# Altium PCB 01.PcbDoc (part 2 of 2)
Units mil, origin at the board's own origin, x right, y up, seen from the top; angles counter-clockwise.
Board outline 1732.26 x 1717.09 mil, 4 copper layers (Top Layer, Layer 1, Layer 2, Bottom Layer), stack 61.855 mil thick; 174 components, 95 nets, 460 pads, 94 vias.
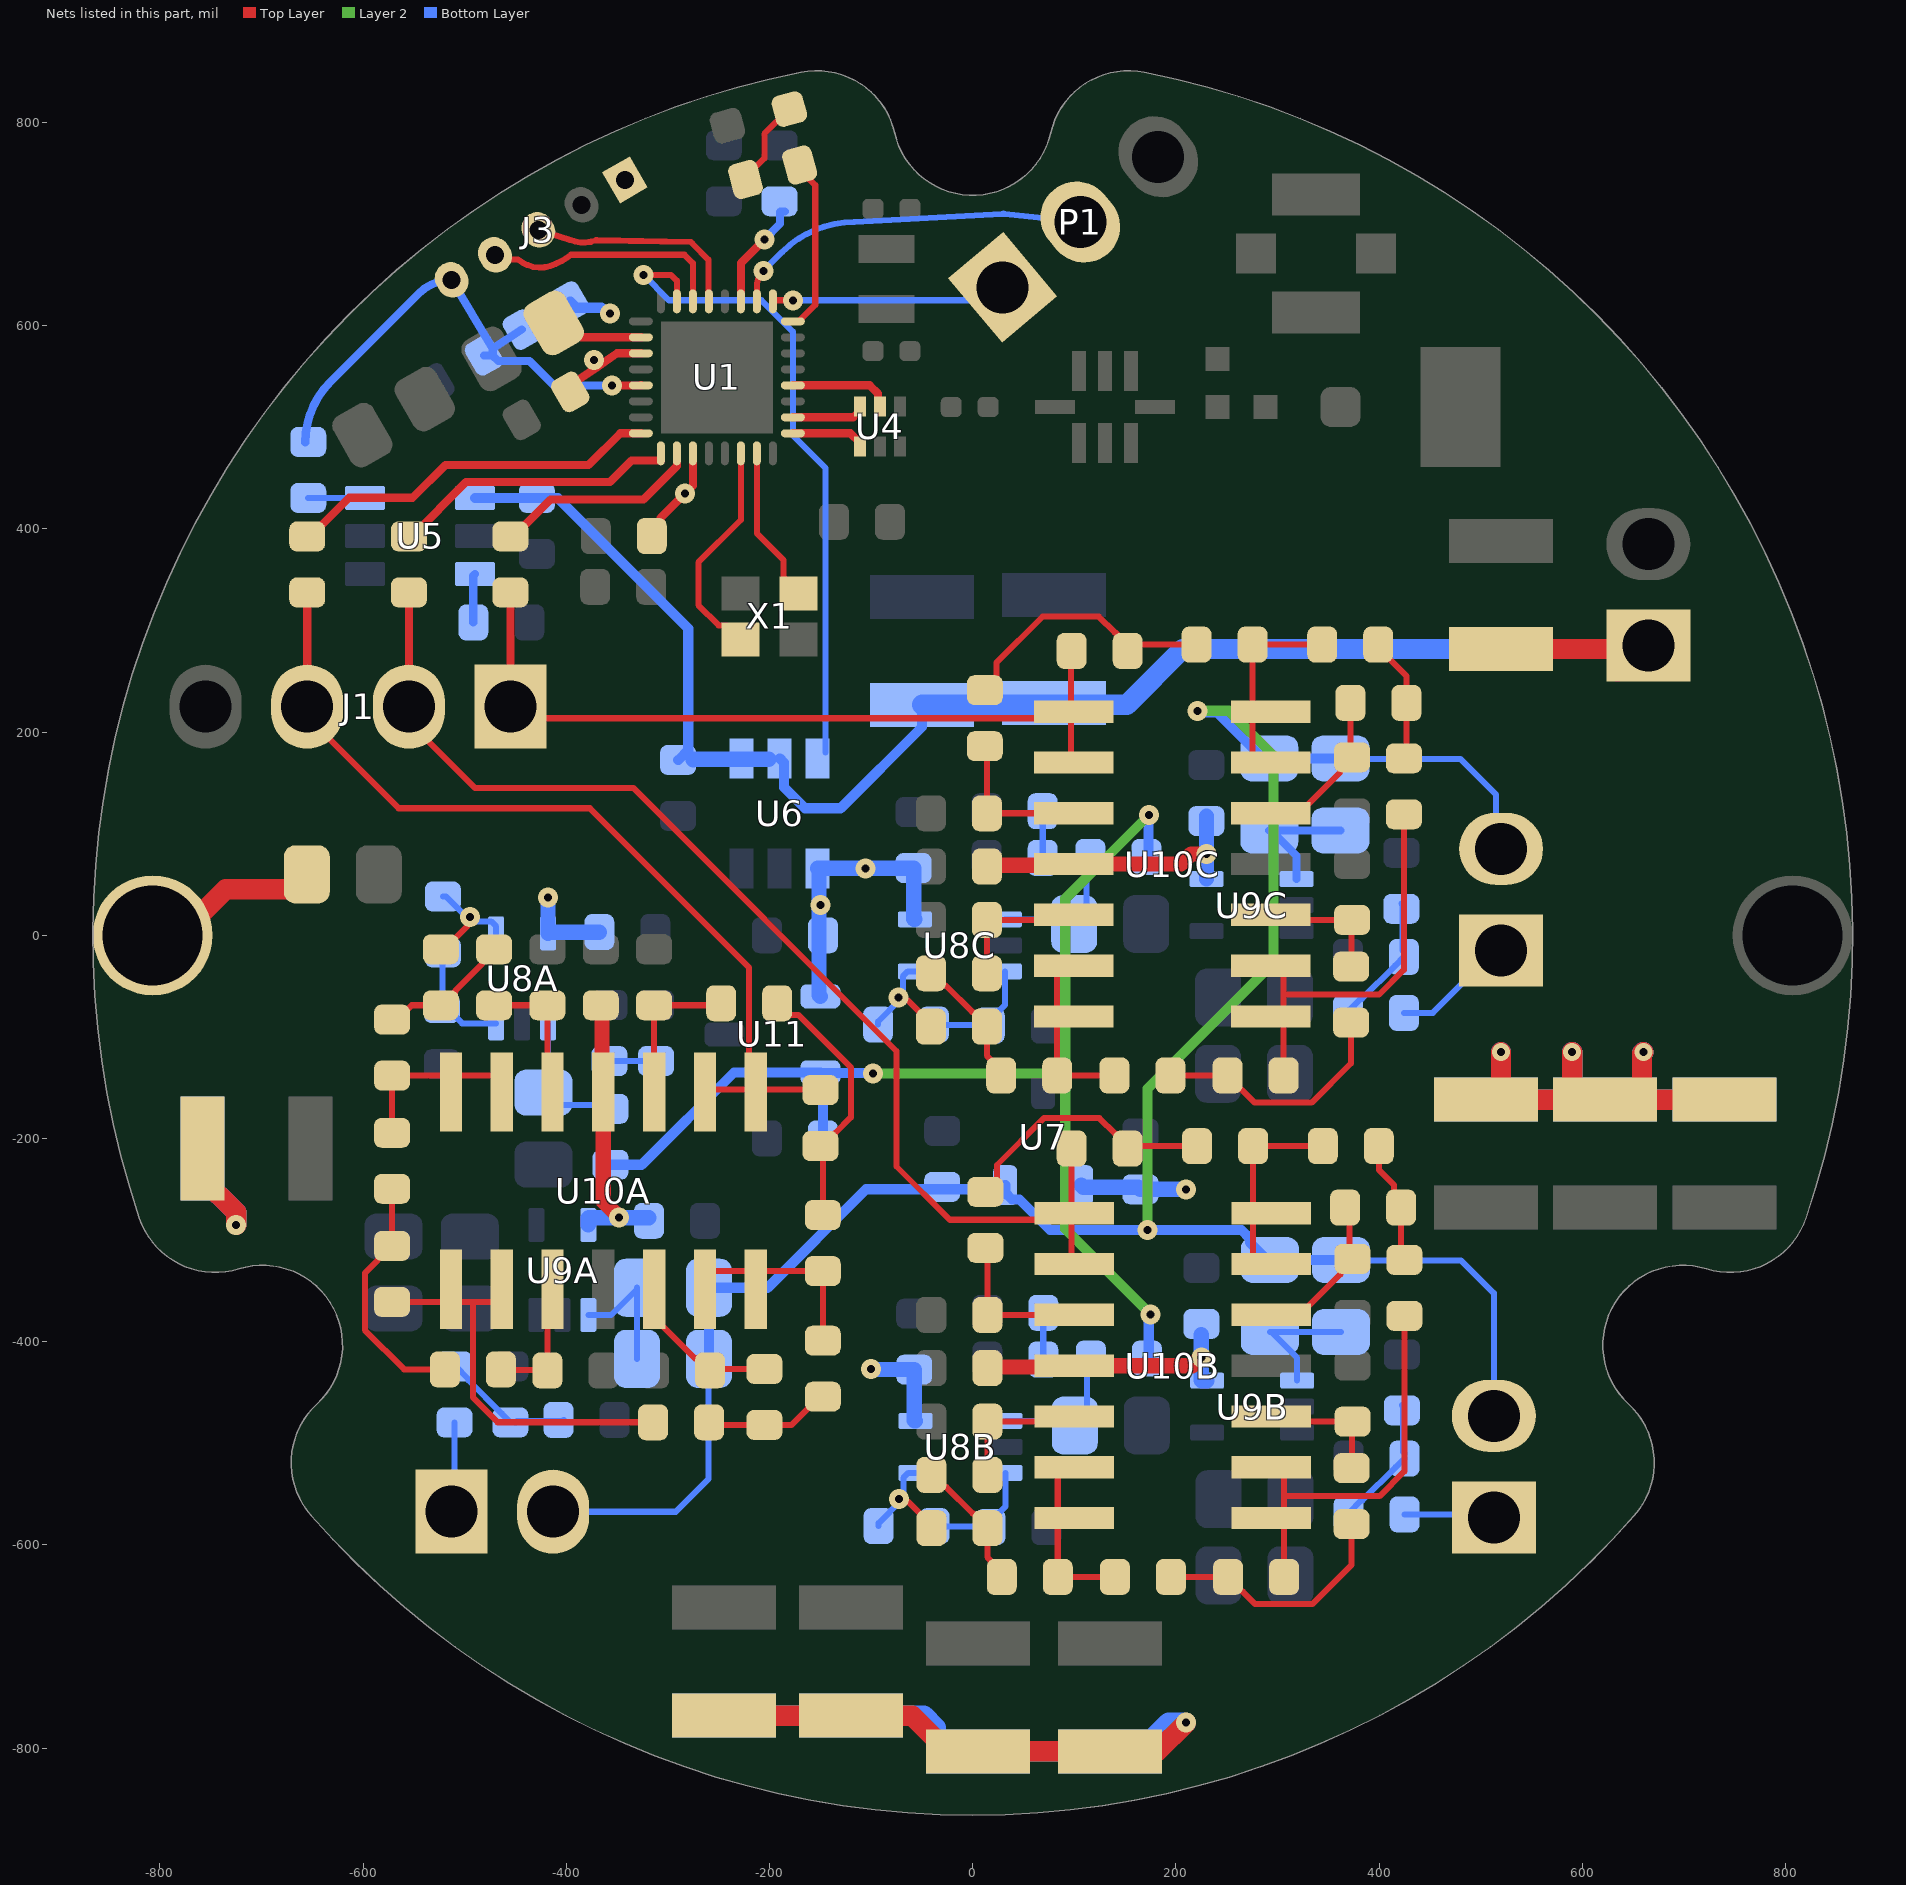
[diagram p4: the nets of this part, all layers, seen from the top]

## Via types
v1: diameter 17.72/19.68/19.68/19.68 (per signal layer), hole 7.87, Top Layer to Bottom Layer, tented both sides, 80 vias
v2: diameter 17.72, hole 7.87, Top Layer to Bottom Layer, tented both sides, 14 vias

## Nets (pads, with @x,y where several pads share a name; then routed paths per layer and width w, separated by ;. In a path a pad name is that pad's centre, name@x,y a point inside that pad or via, vN(x,y) a via of type N, cw(c..) or ccw(c..) an arc to the next point about the centre after c; other vN are vias at no path point) (continued)
NetC28A_1: C28A.1 R11A.2 R12A.1 | length 126.9
  Bottom Layer w6: R11A.2@-510,-424.33 -508.88,-424.33 -496.28,-436.92 -496.28,-438.05 -463.56,-470.77 -463.46,-470.77 R12A.1@-455,-479.23 ; R12A.1@-450,-479.45 -448.72,-478.17 -403.84,-478.17 C28A.1@-402.56,-476.89
NetC28B_1: C28B.1 R11B.2 R12B.1 | length 126.9
  Bottom Layer w6: R11B.2@369.88,-570 369.88,-568.88 382.48,-556.28 383.6,-556.28 416.32,-523.56 416.32,-523.46 R12B.1@424.78,-515 ; C28B.1@422.44,-462.56 423.72,-463.84 423.72,-508.72 R12B.1@425,-510
NetC28C_1: C28C.1 R11C.2 R12C.1 | length 126.9
  Bottom Layer w6: R11C.2@369.33,-76.34 369.33,-75.22 381.92,-62.62 383.05,-62.62 415.77,-29.9 415.77,-29.8 R12C.1@424.23,-21.34 ; C28C.1@421.89,31.1 423.17,29.82 423.17,-15.06 R12C.1@424.45,-16.34
NetC29A_1: C29A.1 C34A.2 R14A.2 R15A.1 U8A.1 | length 223.5
  Bottom Layer w6: U8A.1@-417.97,-86.62 -417.97,-150.31 -420.26,-152.6 -405.87,-167 -360.33,-167 -357.06,-163.73 -357.06,-124.39 R15A.1@-357.56,-123.89 C34A.2@-311.56,-123.89
NetC29B_1: C29B.1 C34B.2 R14B.2 R15B.1 U8B.1 | length 223.5
  Bottom Layer w6: U8B.1@32.17,-477.97 95.86,-477.97 98.15,-480.26 112.55,-465.87 112.55,-420.33 109.28,-417.06 69.94,-417.06 R15B.1@69.44,-417.56 C34B.2@69.44,-371.56
NetC29C_1: C29C.1 C34C.2 R14C.2 R15C.1 U8C.1 | length 223.5
  Bottom Layer w6: U8C.1@31.62,15.69 95.31,15.69 97.6,13.4 112,27.79 112,73.33 108.73,76.6 69.39,76.6 R15C.1@68.89,76.1 C34C.2@68.89,122.1
NetC30A_1: C30A.1 R13A.2 U9A.1 | length 128.5
  Bottom Layer w6: U9A.1@-378.36,-373.73 -355.88,-373.73 C30A.1@-330.43,-348.29 ; R13A.2@-330.43,-416.89 C30A.1@-330.43,-348.29 ; C30A.1@-330.43,-346.89 C30A.1@-330.43,-348.29
NetC30B_1: C30B.1 R13B.2 U9B.1 | length 128.5
  Bottom Layer w6: C30B.1@292.44,-390.43 C30B.1@293.84,-390.43 ; U9B.1@319.28,-438.36 319.28,-415.88 C30B.1@293.84,-390.43 ; R13B.2@362.44,-390.43 C30B.1@293.84,-390.43
NetC30C_1: C30C.1 R13C.2 U9C.1 | length 128.2
  Bottom Layer w8: C30C.1@291.89,103.23 C30C.1@293.83,103.23 ; U9C.1@318.73,55.3 318.73,78.33 C30C.1@293.83,103.23 ; R13C.2@361.89,103.23 C30C.1@293.83,103.23
NetC35A_1: C35A.1 R16A.2 R17A.1 | length 259.2
  Top Layer w6: R17A.1@-196,-66.91 -184.57,-78.34 -171.66,-78.34 -120,-130 -120,-179.14 -135.55,-194.69 -135.55,-195.27 -146.98,-206.7 -147.56,-206.7 R16A.2@-147.56,-275.3
NetC35A_2: C35A.2 J1.3 R2.1 U10A.1 U10A.2 | length 899.2
  Top Layer w6: J1.3@-655,225 -655,215 -565,125 -376.89,125 -220,-31.89 -220,-147.89 U10A.1@-216.31,-151.58 ; U10A.2@-263.56,-154.33 -260.81,-151.58 U10A.1@-216.31,-151.58 ; U10A.1@-213.56,-154.33 U10A.1@-216.31,-151.58 ; U10A.1@-213.56,-151.58 C35A.2@-147.56,-151.58
  Top Layer w8: J1.3@-655,225 R2.1@-655,337.44
NetC35B_1: C35B.1 R16B.2 R17B.1 | length 262.4
  Top Layer w6: R17B.1@12.46,-256 23.89,-244.57 23.89,-226.11 70,-180 124.69,-180 140.24,-195.55 140.82,-195.55 152.25,-206.98 152.25,-207.56 R16B.2@220.85,-207.56
NetC35B_2: C35B.2 J1.2 R3.1 U10B.1 U10B.2 | length 1165
  Top Layer w6: J1.2@-555,225 -555,210 -490,145 -334,145 -75,-114 -75,-227.56 -22.56,-280 93.44,-280 97.13,-276.31 97.13,-320.81 U10B.2@99.88,-323.56 ; U10B.1@97.13,-273.56 C35B.2@97.13,-207.56
  Top Layer w8: J1.2@-555,225 R3.1@-555,337.44
NetC35C_1: C35C.1 R16C.2 R17C.1 | length 262.9
  Top Layer w6: R17C.1@11.91,237.66 23.34,249.09 23.34,268.34 68.66,313.66 124.14,313.66 139.69,298.11 140.27,298.11 151.7,286.68 151.7,286.1 R16C.2@220.3,286.1
NetC35C_2: C35C.2 J1.1 R4.1 U10C.1 U10C.2 | length 791.3
  Top Layer w6: J1.1@-455,225 -443.66,213.66 92.89,213.66 U10C.1@96.58,217.35 ; C35C.2@96.58,286.1 U10C.1@96.58,217.35 ; U10C.2@99.33,170.1 96.58,172.85 U10C.1@96.58,217.35 ; U10C.1@99.33,220.1 U10C.1@96.58,217.35
  Top Layer w8: J1.1@-455,225 R4.1@-455,337.44
NetC36A_1: C36A.1 R18A.2 R19A.1 | length 124.4
  Top Layer w6: R18A.2@-259.44,-479.33 -256.88,-481.89 R19A.1@-205,-481.89 -178.26,-481.89 -150.51,-454.14 C36A.1@-147.56,-454.14
NetC36A_2: C36A.2 R16A.1 U10A.13 U10A.14 | length 197.8
  Top Layer w6: U10A.13@-263.56,-348.33 -263.56,-338.42 -255.56,-330.42 R16A.1@-147.56,-330.42 C36A.2@-147.56,-399.02
NetC36B_1: C36B.1 R18B.2 R19B.1 | length 122.5
  Top Layer w6: C36B.1@399.69,-207.56 399.76,-207.63 399.76,-230.76 414.84,-245.84 414.84,-253.62 426.22,-265 R19B.1@427.44,-265 ; R19B.1@421.56,-268 421.56,-316.12 R18B.2@424.88,-319.44
NetC36B_2: C36B.2 R16B.1 U10B.13 U10B.14 | length 197.8
  Top Layer w6: U10B.13@293.88,-323.56 283.97,-323.56 275.97,-315.56 R16B.1@275.97,-207.56 C36B.2@344.57,-207.56
NetC36C_1: C36C.1 R18C.2 R19C.1 | length 124.4
  Top Layer w6: C36C.1@399.14,286.1 399.14,283.15 426.89,255.4 R19C.1@426.89,228.66 426.89,176.78 R18C.2@424.33,174.22
NetC36C_2: C36C.2 R16C.1 U10C.13 U10C.14 | length 197.8
  Top Layer w6: U10C.13@293.33,170.1 283.42,170.1 275.42,178.1 R16C.1@275.42,286.1 C36C.2@344.02,286.1
NetC37A_1: C37A.1 R20A.2 R21A.1 | length 245.3
  Top Layer w6: R20A.2@-571.56,-249.52 C37A.1@-571.56,-305.77 -572.14,-305.77 -586,-319.63 -586,-320.21 -598.28,-332.49 -598.28,-388.61 -559.56,-427.33 R21A.1@-519.56,-427.33
NetC37A_2: C37A.2 R18A.1 U10A.8 U10A.9 | length 398.3
  Top Layer w6: C37A.2@-571.56,-360.89 -513.56,-360.89 -490,-360.89 ; U10A.9@-463.56,-348.33 -463.56,-352.89 -471.56,-360.89 -490,-360.89 ; R18A.1@-314.56,-479.33 -467.56,-479.33 -492,-454.89 -492,-362.89 -490,-360.89
NetC37B_1: C37B.1 R20B.2 R21B.1 | length 245.3
  Top Layer w6: R20B.2@195.07,-631.56 C37B.1@251.32,-631.56 251.32,-632.14 265.18,-646 265.76,-646 278.04,-658.28 334.17,-658.28 372.88,-619.56 R21B.1@372.88,-579.56
NetC37B_2: C37B.2 R18B.1 U10B.8 U10B.9 | length 398.3
  Top Layer w6: U10B.9@293.88,-523.56 298.44,-523.56 306.44,-531.56 306.44,-550 ; C37B.2@306.44,-631.56 306.44,-573.56 306.44,-550 ; R18B.1@424.88,-374.56 424.88,-527.56 400.44,-552 308.44,-552 306.44,-550
NetC37C_1: C37C.1 R20C.2 R21C.1 | length 245.3
  Top Layer w6: R20C.2@194.52,-137.9 C37C.1@250.77,-137.9 250.77,-138.48 264.63,-152.34 265.21,-152.34 277.49,-164.61 333.61,-164.61 372.33,-125.9 R21C.1@372.33,-85.9
NetC37C_2: C37C.2 R18C.1 U10C.8 U10C.9 | length 398.3
  Top Layer w6: U10C.9@293.33,-29.9 297.89,-29.9 305.89,-37.9 305.89,-56.34 ; C37C.2@305.89,-137.9 305.89,-79.9 305.89,-56.34 ; R18C.1@424.33,119.1 424.33,-33.9 399.89,-58.34 307.89,-58.34 305.89,-56.34
NetC38A_1: C38A.1 R22A.2 R23A.1 | length 131.4
  Top Layer w6: C38A.1@-571.56,-83.02 -566.23,-83.02 -552.1,-68.89 -522.98,-68.89 -509.12,-55.03 -509.12,-54.45 -483.07,-28.4 -483.07,-25.2 -471.64,-13.77 R23A.1@-471.06,-13.77
NetC38A_2: C38A.2 R20A.1 U10A.6 U10A.7 | length 175.8
  Top Layer w6: R20A.1@-571.56,-194.4 C38A.2@-571.56,-138.14 -471.56,-138.14 -463.56,-146.14 U10A.6@-463.56,-154.33
NetC38B_1: C38B.1 R22B.2 R23B.1 | length 131.4
  Top Layer w6: R23B.1@-40.68,-531.06 -40.68,-531.64 -29.25,-543.07 -26.05,-543.07 0,-569.12 0.58,-569.12 14.44,-582.98 14.44,-612.1 28.58,-626.23 C38B.1@28.58,-631.56
NetC38B_2: C38B.2 R20B.1 U10B.6 U10B.7 | length 175.8
  Top Layer w6: U10B.6@99.88,-523.56 91.69,-523.56 83.69,-531.56 C38B.2@83.69,-631.56 R20B.1@139.95,-631.56
NetC38C_1: C38C.1 R22C.2 R23C.1 | length 131.4
  Top Layer w6: R23C.1@-41.23,-37.4 -41.23,-37.98 -29.8,-49.41 -26.6,-49.41 -0.55,-75.46 0.03,-75.46 13.89,-89.32 13.89,-118.44 28.02,-132.57 C38C.1@28.02,-137.9
NetC38C_2: C38C.2 R20C.1 U10C.6 U10C.7 | length 175.8
  Top Layer w6: U10C.6@99.33,-29.9 91.14,-29.9 83.14,-37.9 C38C.2@83.14,-137.9 R20C.1@139.4,-137.9
NetC39A_2: C39A.2 R17A.2 U10A.3 | length 148.9
  Top Layer w6: U10A.3@-313.56,-154.33 C39A.2@-313.56,-68.89 -253.68,-68.89 R17A.2@-251.12,-66.33
NetC39B_2: C39B.2 R17B.2 U10B.3 | length 148.9
  Top Layer w6: R17B.2@11.88,-311.12 14.44,-313.68 C39B.2@14.44,-373.56 U10B.3@99.88,-373.56
NetC39C_2: C39C.2 R17C.2 U10C.3 | length 148.9
  Top Layer w6: R17C.2@11.33,182.54 13.89,179.98 C39C.2@13.89,120.1 U10C.3@99.33,120.1
NetC40A_1: C40A.1 R19A.2 U10A.12 | length 159.1
  Top Layer w6: U10A.12@-313.56,-348.33 -313.56,-376.33 -273.57,-416.32 -269.87,-416.32 -258.44,-427.75 C40A.1@-258.44,-428.33 -256.88,-426.77 R19A.2@-205,-426.77
NetC40B_1: C40B.1 R19B.2 U10B.12 | length 158.5
  Top Layer w6: U10B.12@293.88,-373.56 321.88,-373.56 361.87,-333.57 361.87,-329.87 373.3,-318.44 C40B.1@373.88,-318.44 371,-315.56 371,-272.56 R19B.2@366.44,-268
NetC40C_1: C40C.1 R19C.2 U10C.12 | length 159.1
  Top Layer w6: U10C.12@293.33,120.1 321.33,120.1 361.32,160.09 361.32,163.79 372.75,175.22 C40C.1@373.33,175.22 371.77,176.78 R19C.2@371.77,228.66
NetC41A_2: C41A.2 R21A.2 U10A.10 | length 128.4
  Top Layer w6: R21A.2@-464.44,-427.33 -463.94,-427.83 -419.06,-427.83 C41A.2@-418.56,-428.33 -418.56,-353.33 U10A.10@-413.56,-348.33
NetC41B_2: C41B.2 R21B.2 U10B.10 | length 128.4
  Top Layer w6: U10B.10@293.88,-473.56 298.88,-478.56 C41B.2@373.88,-478.56 373.38,-479.06 373.38,-523.94 R21B.2@372.88,-524.44
NetC41C_2: C41C.2 R21C.2 U10C.10 | length 128.4
  Top Layer w6: U10C.10@293.33,20.1 298.33,15.1 C41C.2@373.33,15.1 372.83,14.6 372.83,-30.28 R21C.2@372.33,-30.78
NetC42A_2: C42A.2 R23A.2 U10A.5 | length 140
  Top Layer w6: R23A.2@-471.06,-68.89 C42A.2@-418.56,-68.89 -418.56,-149.33 U10A.5@-413.56,-154.33
NetC42B_2: C42B.2 R23B.2 U10B.5 | length 140
  Top Layer w6: R23B.2@14.44,-531.06 C42B.2@14.44,-478.56 94.88,-478.56 U10B.5@99.88,-473.56
NetC42C_2: C42C.2 R23C.2 U10C.5 | length 140
  Top Layer w6: R23C.2@13.89,-37.4 C42C.2@13.89,15.1 94.33,15.1 U10C.5@99.33,20.1
NetC55_2: C55.2 MH1.1 | length 177.7
  Top Layer w20: MH1.1@-807.09,0 -780.54,0 -735.06,45.48 -667.99,45.48 -655.43,58.03 C55.2@-655.43,60
NetD1_2: D1.2 R1.2 | length 87.1
  Top Layer w6: R1.2@-223.62,743.87 -223.62,746.14 -205,764.76 -205,788.73 D1.2@-180.58,813.15
NetL1_2: L1.2 U1.18 | length 91.5
  Top Layer w8: L1.2@-412.31,602.72 -399.18,602.72 -385.03,588.57 U1.18@-326.68,588.57
NetP1_1: P1.1 U1.9 | length 229.8
  Top Layer w6: U1.9@-196.76,624 cw(c-194.34,621.59) -194.34,625 v1(-177,625)
  Bottom Layer w6: v1(-177,625) -1.32,625 ccw(c-1.32,668.43) P1.1@29.4,637.72
NetP1_2: P1.2 U1.10 | length 360
  Top Layer w6: U1.10@-212.5,624 -212.5,638.3 cw(c-190.3,638.3) v1(-206,654)
  Bottom Layer w6: v1(-206,654) -187.29,672.71 cw(c-116.58,602) -116.58,702 ccw(c-116.58,708) -116.24,702.01 28.91,710.13 cw(c29.97,692.16) 31.96,710.05 P1.2@106,702
NetP3A_1: P3A.1 R11A.1 | length 89.1
  Bottom Layer w6: P3A.1@-513,-567.33 -510,-564.33 R11A.1@-510,-479.45
NetP3B_1: P3B.1 R11B.1 | length 89.1
  Bottom Layer w6: R11B.1@425,-570 509.88,-570 P3B.1@512.88,-573
NetP3C_1: P3C.1 R11C.1 | length 111.8
  Bottom Layer w6: R11C.1@424.45,-76.34 452.76,-76.34 504.09,-25 P3C.1@515,-25
NetR1_1: R1.1 U1.8 | length 172.7
  Top Layer w6: U1.8@-177.07,604.32 -171.25,604.32 -155,620.56 -155,738.34 -170.38,753.72 R1.1@-170.38,758.13
NetR2_2: R2.2 U1.24 | length 370.4
  Top Layer w8: R2.2@-655,392.56 -652.05,392.56 -613.99,430.62 -551.38,430.62 -519,463 -378,463 -346.92,494.08 U1.24@-326.68,494.08
NetR3_2: R3.2 U1.25 | length 286.1
  Top Layer w8: R3.2@-555,392.56 -552.05,392.56 -498.61,446 -357,446 -335.86,467.14 -307.06,467.14 -306.99,467.21 U1.25@-306.99,474.39
NetR4_2: R4.2 U1.26 | length 205.1
  Top Layer w8: R4.2@-455,392.56 -452.05,392.56 -415.61,429 -324,429 -291.24,461.76 U1.26@-291.24,474.39
NetR6_1: R6.1 U5.6 | length 55.8
  Bottom Layer w6: R6.1@-653.96,430.4 U5.6@-598.13,430.4
NetR7_1: R7.1 U5.3 | length 48.3
  Bottom Layer w8: R7.1@-491.56,308 -491.56,353.91 U5.3@-489.87,355.6
NetR9A_1: R9A.1 R10A.2 U8A.3 | length 113.9
  Bottom Layer w6: R10A.2@-521.56,-16.89 -522.06,-17.39 -522.06,-71.27 -517.73,-71.27 -502.38,-86.62 U8A.3@-469.15,-86.62
NetR9B_1: R9B.1 R10B.2 U8B.3 | length 113.9
  Bottom Layer w6: R10B.2@-37.56,-581.56 -37.06,-582.06 16.82,-582.06 16.82,-577.73 32.17,-562.38 U8B.3@32.17,-529.15
NetR9C_1: R9C.1 R10C.2 U8C.3 | length 113.9
  Bottom Layer w6: R10C.2@-38.11,-87.9 -37.61,-88.4 16.27,-88.4 16.27,-84.07 31.62,-68.72 U8C.3@31.62,-35.49
NetR10A_1: R10A.1 R22A.1 U8A.4 | length 113.2
  Top Layer w6: R22A.1@-523.56,-13.77 -520.61,-13.77 -497.24,9.59 -497.24,15.87 v1(-495,18.11)
  Bottom Layer w6: R10A.1@-521.56,38.23 -518.61,38.23 v1@-496.74,16.37 ; v1@-494.1,13.72 -474.02,13.72 -469.15,8.85 U8A.4@-469.15,1.96
NetR10B_1: R10B.1 R22B.1 U8B.4 | length 113.2
  Top Layer w6: v1(-72.56,-555) -70.32,-557.24 -64.04,-557.24 -40.68,-580.61 R22B.1@-40.68,-583.56
  Bottom Layer w6: R10B.1@-92.68,-581.56 -92.68,-578.61 v1@-70.82,-556.74 ; v1@-68.17,-554.1 -68.17,-534.02 -63.3,-529.15 U8B.4@-56.41,-529.15
NetR10C_1: R10C.1 R22C.1 U8C.4 | length 113.2
  Top Layer w6: v1(-73.11,-61.34) -70.87,-63.58 -64.59,-63.58 -41.23,-86.94 R22C.1@-41.23,-89.9
  Bottom Layer w6: R10C.1@-93.23,-87.9 -93.23,-84.94 v1@-71.37,-63.08 ; v1@-68.72,-60.44 -68.72,-40.36 -63.85,-35.49 U8C.4@-56.96,-35.49
NetU1_1: U1.1 U4.4 | length 73.8
  Top Layer w8: U1.1@-177.07,494.08 -120.14,494.08 -111,484.94 U4.4@-111,481
NetU1_2: U1.2 U4.3 | length 72.7
  Top Layer w8: U1.2@-177.07,509.83 -117.61,509.83 -111,516.43 U4.3@-111,520.37
NetU1_4: U1.4 U4.2 | length 100.8
  Top Layer w8: U1.4@-177.07,541.32 -101.32,541.32 -93.22,533.22 -93.22,522.28 U4.2@-91.32,520.37
NetU1_30: U1.30 X1.3 | length 222.1
  Top Layer w6: X1.3@-228.54,291.36 -242.28,305.09 -250.09,305.09 -270,325 -270,367 -228.25,408.75 U1.30@-228.25,474.39
NetU1_31: U1.31 X1.1 | length 154.3
  Top Layer w6: U1.31@-212.5,474.39 -212.5,395.5 -186.16,369.16 -186.16,352.37 -172.43,338.64 X1.1@-170.46,338.64
RESET: C10.1 J3.5 R5.1 R6.2 U1.21 | length 512
  Top Layer w8: v1(-355,541) -354.74,541.26 -326.74,541.26 U1.21@-326.68,541.32
  Bottom Layer w8: R6.2@-657,485 cw(c-572.5,485) -632.22,544.78 -545.23,631.77 cw(c-512.86,599.41) J3.5@-512.86,645.18 C10.1@-472.47,577.65 ; C10.1@-481.13,570.78 C10.1@-472.47,570.78 ; R5.1@-443.87,596.22 C10.1@-472.47,577.65 ; v1(-355,541) -412,541 -436.34,565.34 -467.04,565.34 C10.1@-472.47,570.78 ; C10.1@-472.47,570.78 C10.1@-472.47,577.65
TCKC: J3.4 U1.14 | length 226.8
  Top Layer w6: J3.4@-456.27,665.33 -447.58,665.33 ccw(c-425.65,690.98) -410.73,660.72 -410.64,660.76 -409.11,661.51 ccw(c-427.6,707.57) -395.35,669.84 -283.85,669.84 -275.5,661.49 U1.14@-275.5,624
TMSC: J3.3 U1.13 | length 218.3
  Top Layer w6: J3.3@-427.62,694.39 J3.3@-423.78,694.39 ; J3.3@-424.14,693.28 -397.54,684.8 -396.75,684.54 -396.24,684.53 ccw(c-383.03,715.59) -370.93,684.09 -369.9,684.09 cw(c-369.87,678.09) -369.75,684.08 -277.52,682.52 -275.8,680.8 -260.11,665.11 -260.11,624.36 U1.13@-259.75,624
VCC: C9.1 C11.1 C12.1 C13.1 C14.1 C15.2 C16.2 C17.2 C18.2 C19.2 C20.2 C21.2 C22.2 C23.2 C24.2 C43.2 C44.2 C45.2 C46.2 C47.2 C48.2 C49.2 C50.2 C51.2 C52.2 J3.1 P2.1 R5.2 U1.11 U1.19 U1.27 U5.1 U6.4 U6.5 | length 3834.9
  Top Layer w8: C12.1@-394.1,542.68 -368.85,559.93 -350,572.82 U1.19@-326.68,572.82 ; C13.1@-315.88,393 -307.21,401.68 -307.21,410.79 v1(-283,435) -275.5,442.5 U1.27@-275.5,474.39 ; U1.11@-228.25,624 -228.25,661.75 v1(-205,685) v1@-202.93,687.07
  Top Layer w20: C22.2@-758.15,-210 -758.15,-239.53 -725,-272.68 v1(-725,-285) ; C24.2@-245,-768.15 C21.2@-120,-768.15 -59.53,-768.15 -24.53,-803.15 C19.2@5,-803.15 C20.2@135,-803.15 181.85,-803.15 v1(210,-775) ; v2(520,-115) 520,-156.85 525,-161.85 C16.2@601.65,-161.85 ; C15.2@520,281.85 P2.1@650,281.85 ; v2(590,-115) 590,-150.2 C16.2@601.65,-161.85 ; P2.1@635,259.57 651.36,275.93 655.93,275.93 P2.1@665,285 ; v2(660,-115) 658.82,-116.18 658.82,-150.2 C16.2@647.17,-161.85 ; C17.2@740,-161.85 C16.2@647.17,-161.85 ; C16.2@601.65,-161.85 C16.2@622.5,-161.85 C16.2@647.17,-161.85
  Bottom Layer w8: v1(-205,685) -189.64,700.36 -189.64,711.93 -189.13,712.44 C11.1@-185,712.44
  Bottom Layer w10: U5.1@-489.87,430.4 -408.4,430.4 -280,302 -280,182.14 -289.58,172.56 C14.1@-290,172.56 ; R5.2@-396.13,623.78 -389.96,617.61 -365.23,617.61 -359.62,612 v1(-357,612) ; U6.5@-190,174.13 -185.71,169.85 -185.71,145.71 -165,125 -130,125 -50,205 C44.2@-50,226.85
  Bottom Layer w15: C14.1@-275,172.56 -274.21,173.35 U6.5@-200.79,173.35
  Bottom Layer w20: C45.2@-758.15,-210 -758.15,-239.53 -725,-272.68 v1(-725,-285) ; C52.2@-245,-768.15 C51.2@-120,-768.15 -47.9,-768.15 -36.18,-779.87 -36.18,-791.5 -24.53,-803.15 C50.2@5,-803.15 C49.2@135,-803.15 164.53,-803.15 192.68,-775 v1(210,-775) ; C44.2@-50,226.85 151.85,226.85 206.85,281.85 C43.2@520,281.85 P2.1@655.94,281.85 ; v2(520,-115) 520,-161.85 601.65,-161.85 590,-150.2 v2(590,-115) ; C47.2@622.5,-161.85 C47.2@647.17,-161.85 ; P2.1@635,260.91 P2.1@655.94,281.85 ; v2(660,-115) 658.82,-116.18 658.82,-150.2 C47.2@647.17,-161.85 ; P2.1@665,285 659.09,285 P2.1@655.94,281.85 ; C46.2@740,-161.85 C47.2@647.17,-161.85
  other v1: -373,566
VLOAD: C26.1 C31A.1 C31B.1 C31C.1 C32A.1 C32B.1 C32C.1 C33A.1 C33B.1 C33C.1 C53.1 U6.1 U7.1 U8A.5 U8B.5 U8C.5 U9A.5 U9B.5 U9C.5 U10A.4 U10B.4 U10C.4 U11.1 | length 1390.5
  Top Layer w15: C31A.1@-366.06,-68.89 -364.81,-70.14 -364.81,-153.08 U10A.4@-363.56,-154.33 -363.56,-261.98 -348.27,-277.26 v1(-348.27,-278) ; C31C.1@13.89,67.6 15.14,68.85 98.08,68.85 U10C.4@99.33,70.1 205.1,70.1 215,80 v1(230,80) ; C31B.1@14.44,-426.06 15.69,-424.81 98.63,-424.81 U10B.4@99.88,-423.56 216.33,-423.56 224.26,-415.63 v1(225,-415.63)
  Bottom Layer w15: U8A.5@-417.97,1.96 -417.97,2.74 -417.59,3.11 C33A.1@-367.56,3.11 ; U8A.5@-417.97,1.96 v1(-418,37) ; U9A.5@-378.36,-285.15 -378.36,-278.37 -377.99,-278 v1(-348.27,-278) C32A.1@-318.56,-278 ; U11.1@-150,-60.2 -151.3,-58.9 -151.3,64.57 U6.1@-152.6,65.87 -152.48,65.98 v1(-105.35,65.98) -58.23,65.98 C33C.1@-58.11,66.1 -58.11,16.07 -57.74,15.69 U8C.5@-56.96,15.69 ; v1(-100,-427) -99.72,-427.28 -57.84,-427.28 C33B.1@-57.56,-427.56 -57.56,-477.59 -57.18,-477.97 U8B.5@-56.41,-477.97 ; U7.1@106.8,-246 108.8,-248 163,-248 C53.1@165,-250 v1(210,-250) ; C32B.1@225,-393.26 v1(225,-415.63) 225,-437.99 225.37,-438.36 U9B.5@230.7,-438.36 ; C32C.1@230,117.54 C32C.1@230,112.44 v1(230,80) 230,55.45 U9C.5@230.15,55.3
  other v1: -150,30
VLOAD_CTRL: U1.15 U6.6 | length 653.1
  Top Layer w6: v1(-324,650) -297,650 -291.24,644.24 U1.15@-291.24,624
  Bottom Layer w6: v1(-324,650) -299,625 -208,625 -177,594 -177,492 -145,460 U6.6@-145,179.76
Vref_1: C27.1 C30A.2 C30B.2 C30C.2 P3A.2 P3B.2 P3C.2 R13A.1 R13B.1 R13C.1 U7.2 | length 2334.1
  Layer 2 w10: v1(172,-290) 172,-151 296,-27 296,177 252,221 v1(221,221)
  Bottom Layer w6: P3A.2@-413,-567.33 -292.33,-567.33 -260,-535 -260,-417.32 R13A.1@-259.57,-416.89 ; R13C.1@361.89,174.09 362.32,173.66 480,173.66 515,138.66 515,90 P3C.2@520,85 ; R13B.1@362.44,-319.57 362.87,-320 480.55,-320 512.88,-352.33 P3B.2@512.88,-473
  Bottom Layer w10: R13A.1@-259.57,-416.89 C30A.2@-259.57,-346.89 -201.89,-346.89 -105,-250 U7.2@32,-250 ; U7.2@32,-246 U7.2@32,-250 ; v1(221,221) 222.85,219.15 240.93,219.15 285.98,174.09 C30C.2@291.89,174.09 R13C.1@361.89,174.09 ; R13B.1@362.44,-319.57 C30B.2@292.44,-319.57 289.96,-319.57 272.78,-302.39 272.78,-298.29 264.49,-290 v1(172,-290) 76,-290 46.13,-260.13 38.74,-260.13 32,-253.38 U7.2@32,-250
Vref_2: C54.1 R14A.1 R14B.1 R14C.1 U11.2 | length 1198.8
  Layer 2 w10: v1(-98,-136) 91,-136 ; v1(173.46,118.46) 91,36 91,-136 ; v1(175,-373) 91,-289 91,-136
  Bottom Layer w10: R14A.1@-356.56,-225.89 -325.89,-225.89 -235,-135 U11.2@-150,-135 U11.2@-149.5,-135.5 ; C54.1@-147.44,-200 -147.44,-137.56 U11.2@-149.5,-135.5 ; v1(-98,-136) -98.5,-135.5 U11.2@-149.5,-135.5 ; R14C.1@170.89,77.1 172.94,79.16 172.94,117.94 v1(173.46,118.46) ; R14B.1@171.44,-416.56 173.22,-414.78 173.22,-374.78 v1(175,-373)
pads on no net: MH2.1 U1.22 U1.23 U3.2 U3.6 U5.5 U6.3

## Polygon pours and split planes (outlines as drawn)
VCC on Layer 2 "NONET_L-01_P-001" (solid, remove dead copper, pour order 13): -651.23,-571.05 cw(c-592.03,-519.14) -645.5,-461.34 ccw(c-698.97,-403.54) -722.29,-328.33 cw(c-745.61,-253.12) -820.17,-278.44 cw(c-0.01,0.01) -168.95,849.51 cw(c-153.59,772.29) -76.8,789.69 ccw(c-0.01,807.09) 76.78,789.69 cw(c153.58,772.29) 168.94,849.51 cw(c-0.01,0.01) 820.16,-278.44 cw(c745.6,-253.12) 722.27,-328.33 ccw(c698.95,-403.54) 645.48,-461.34 cw(c592.01,-519.14) 651.21,-571.05 cw(c-0.01,0.01)
VLOAD on Layer 2 "NONET_L-01_P-001" (solid, remove dead copper, pour order 12): 229,-485 -209,-485 -452,-242 -452,57 -355,154 242,154 299,97 299,-415
NetC55_2 on Top Layer "Top Layer-NetC55_2" (solid, remove dead copper, pour order 14): -859.66,-105.76 cw(c0,0) -859.66,105.76 cw(c-807.09,0)
GND on Top Layer "GND_L01_P001" (solid, remove dead copper, pour order 8): -651.23,-571.05 cw(c-592.03,-519.14) -645.5,-461.34 ccw(c-698.97,-403.54) -722.29,-328.33 cw(c-745.61,-253.12) -820.17,-278.44 cw(c-0.01,0.01) -168.95,849.51 cw(c-153.59,772.29) -76.8,789.69 ccw(c-0.01,807.09) 76.78,789.69 cw(c153.58,772.29) 168.94,849.51 cw(c-0.01,0.01) 820.16,-278.44 cw(c745.6,-253.12) 722.27,-328.33 ccw(c698.95,-403.54) 645.48,-461.34 cw(c592.01,-519.14) 651.21,-571.05 cw(c-0.01,0.01)
GND on Top Layer "GND_L01_P002" (solid, remove dead copper, pour order 10): -326.68,494.08 -326.68,604.32 -306.99,624 -196.76,624 -177.07,604.32 -177.07,494.08 -196.76,474.39 -306.99,474.39
NetC55_2 on Bottom Layer "Bottom Layer-NetC55_2" (solid, remove dead copper, pour order 18): -859.66,-105.76 cw(c0,0) -859.66,105.76 cw(c-807.09,0)
GND on Bottom Layer "GND_L04_P009" (solid, remove dead copper, pour order 9): -651.23,-571.05 cw(c-592.03,-519.14) -645.5,-461.34 ccw(c-698.97,-403.54) -722.29,-328.33 cw(c-745.61,-253.12) -820.17,-278.44 cw(c-0.01,0.01) -168.95,849.51 cw(c-153.59,772.29) -76.8,789.69 ccw(c-0.01,807.09) 76.78,789.69 cw(c153.58,772.29) 168.94,849.51 cw(c-0.01,0.01) 820.16,-278.44 cw(c745.6,-253.12) 722.27,-328.33 ccw(c698.95,-403.54) 645.48,-461.34 cw(c592.01,-519.14) 651.21,-571.05 cw(c-0.01,0.01)
GND on Layer 1 "GND_L02_P001" (solid, remove dead copper, pour order 11): -651.23,-571.05 cw(c-592.03,-519.14) -645.5,-461.34 ccw(c-698.97,-403.54) -722.29,-328.33 cw(c-745.61,-253.12) -820.17,-278.44 cw(c-0.01,0.01) -168.95,849.51 cw(c-153.59,772.29) -76.8,789.69 ccw(c-0.01,807.09) 76.78,789.69 cw(c153.58,772.29) 168.94,849.51 cw(c-0.01,0.01) 820.16,-278.44 cw(c745.6,-253.12) 722.27,-328.33 ccw(c698.95,-403.54) 645.48,-461.34 cw(c592.01,-519.14) 651.21,-571.05 cw(c-0.01,0.01)

## Keep-outs
Top Layer:
  lines w20: -859.67,-105.76 ccw(c-807.09,0) -690.5,18.89 ; -859.67,105.76 cw(c-807.09,0) -713.06,71.48
Layer 1:
  lines w20: -859.67,-105.76 ccw(c-807.09,0) -859.67,105.76
Layer 2:
  lines w20: -859.67,-105.76 ccw(c-807.09,0) -859.67,105.76
Bottom Layer:
  lines w20: -859.67,-105.76 ccw(c-807.09,0) -859.67,105.76
Keep-Out Layer:
  lines w20: -859.67,-105.76 ccw(c-0.01,0.01) -820.17,-278.44 ; -820.17,-278.44 ccw(c-745.61,-253.12) -722.29,-328.33 cw(c-698.97,-403.54) -645.5,-461.34 ccw(c-592.03,-519.14) -651.23,-571.05 ccw(c-0.01,0.01) 651.21,-571.05 ; -713.06,71.48 ccw(c-807.09,0) -859.67,105.76 cw(c-0.01,0.01) -168.95,849.51 cw(c-153.59,772.29) -76.8,789.69 ccw(c-0.01,807.09) 76.78,789.69 cw(c153.58,772.29) 168.94,849.51 cw(c-0.01,0.01) 859.65,105.77 ccw(c807.09,0) 859.65,-105.77 cw(c-0.01,0.01) 820.16,-278.44 ; 651.21,-571.05 ccw(c592.01,-519.14) 645.48,-461.34 cw(c698.95,-403.54) 722.27,-328.33 ccw(c745.6,-253.12) 820.16,-278.44

## Other copper
Top Layer:
  pour cut-out: -710,100 -605,100 -605,15 -710,15
  pour cut-out: -635.78,97.33
  region: -695,-242

## Silkscreen, mask and mechanical layers (free items; w line width, h text height)
Top Overlay:
  text "G" at 220,695 h30
  text "2" at 150,625 h30
  text "1" at 50,545 h30
  text "+ -" at 770,260 h80 r90
  text "G" at -769,116 h40
  text "A" at -667.33,116 h40
  text "B" at -565.67,116 h40
  text "C" at -464,116 h40
  text "C+     C-" at 620,-75 h60 r90
  text "B+    B-" at 610,-592 h60 r90
  text "A+   A-" at -535,-670 h60
Top Solder:
  region: -859.66,-105.76 cw(c0,0) -859.66,105.76 cw(c-807.09,0)
Bottom Solder:
  region: -859.66,-105.76 cw(c0,0) -859.66,105.76 cw(c-807.09,0)
Mechanical 1:
  the board outline again, w0.5
Top Designator:
  text "GND" at 36.33,850.27 h40 r310
  text "VCC" at -361.38,829.8 h40 r120
  text "DIO2" at -9.67,814.27 h40 r310
  text "GND" at -403.37,801.79 h40 r120
  text "TMSC" at -445.37,780.79 h40 r120
  text "DIO1" at -52.67,778.27 h40 r310
  text "TCKC" at -487.37,756.79 h40 r120
  text "RESET" at -532.37,727.79 h40 r120
Drill Drawing:
  circle w10: c-752.75,2028.33 r33.33
  lines w10: -786.08,1561.67 -769.42,1561.67 -752.75,1545 -736.08,1561.67 -719.42,1561.67 -736.08,1578.33 -719.42,1595 -736.08,1595 -752.75,1611.67 -769.42,1595 -786.08,1595 -769.42,1578.33 -786.08,1561.67 ; -786.08,1911.67 -719.42,1911.67 -752.75,1845 -786.08,1911.67
  lines w15: -845.88,1500 5504.4,1500 ; -845.88,2100 5504.4,2100 ; -839.91,2429.99 -430,2429.99 499.74,2429.99 1359.51,2429.99 2009.35,2429.99 2579.21,2429.99 ; -839.91,2549.99 -430,2549.99 499.74,2549.99 1359.51,2549.99 2009.35,2549.99 2579.21,2549.99 ; -839.91,2669.99 -430,2669.99 499.74,2669.99 1359.51,2669.99 2009.35,2669.99 2579.21,2669.99 ; -839.91,2789.99 -430,2789.99 499.74,2789.99 1359.51,2789.99 2009.35,2789.99 2579.21,2789.99 ; -839.91,2909.99 -430,2909.99 499.74,2909.99 1359.51,2909.99 2009.35,2909.99 2579.21,2909.99 ; -839.91,3029.99 -430,3029.99 499.74,3029.99 1359.51,3029.99 2009.35,3029.99 2579.21,3029.99 ; -839.91,3149.99 -430,3149.99 499.74,3149.99 1359.51,3149.99 2009.35,3149.99 2579.21,3149.99 ; -839.91,3269.99 -430,3269.99 499.74,3269.99 1359.51,3269.99 2009.35,3269.99 2579.21,3269.99 ; -839.91,3389.99 -430,3389.99 499.74,3389.99 1359.51,3389.99 2009.35,3389.99 2579.21,3389.99 ; -839.91,3509.99 -430,3509.99 499.74,3509.99 1359.51,3509.99 2009.35,3509.99 2579.21,3509.99 ; -839.91,3629.99 2579.21,3629.99 ; -430,3749.99 -430,2309.99 ; -295,1350 -295,2250 ; 284.85,1350 284.85,2250 ; 499.74,3749.99 499.74,2309.99 ; 1359.51,3749.99 1359.51,2309.99 ; 1384.53,1350 1384.53,2250 ; 1890.4,1350 1890.4,2250 ; 2009.35,3749.99 2009.35,2309.99 ; 2624.21,1350 2624.21,2250 ; 4123.76,1350 4123.76,2250 ; 4713.6,1350 4713.6,2250 ; -430,2309.99 -839.91,2309.99 -839.91,3749.99 2579.21,3749.99 2579.21,2309.99 2009.35,2309.99 ; -430,2309.99 499.74,2309.99 ; 499.74,2309.99 1359.51,2309.99 ; 1359.51,2309.99 2009.35,2309.99 ; -845.88,1350 5504.4,1350 5504.4,2250 -845.88,2250 -845.88,1350
  text "Layer" at -769.91,3659.99 h60
  text "Name" at -360,3659.99 h60
  text "Material" at 569.74,3659.99 h60
  text "Thickness" at 1429.51,3659.99 h60
  text "Constant" at 2079.35,3659.99 h60
  text "Top Overlay" at -360,3539.99 h60
  text "Top Solder" at -360,3419.99 h60
  text "Solder Resist" at 569.74,3419.99 h60
  text "0.40mil" at 1429.51,3419.99 h60
  text "3.5" at 2079.35,3419.99 h60
  text "1" at -769.91,3299.99 h60
  text "Top Layer" at -360,3299.99 h60
  text "Copper" at 569.74,3299.99 h60
  text "1.40mil" at 1429.51,3299.99 h60
  text "Dielectric 2" at -360,3179.99 h60
  text "PP-006" at 569.74,3179.99 h60
  text "7.87mil" at 1429.51,3179.99 h60
  text "4.1" at 2079.35,3179.99 h60
  text "2" at -769.91,3059.99 h60
  text "Layer 1" at -360,3059.99 h60
  text "Copper" at 569.74,3059.99 h60
  text "0.69mil" at 1429.51,3059.99 h60
  text "Dielectric 1" at -360,2939.99 h60
  text "FR-4" at 569.74,2939.99 h60
  text "41.93mil" at 1429.51,2939.99 h60
  text "4.8" at 2079.35,2939.99 h60
  text "3" at -769.91,2819.99 h60
  text "Layer 2" at -360,2819.99 h60
  text "Copper" at 569.74,2819.99 h60
  text "0.69mil" at 1429.51,2819.99 h60
  text "Dielectric 3" at -360,2699.99 h60
  text "PP-006" at 569.74,2699.99 h60
  text "7.87mil" at 1429.51,2699.99 h60
  text "4.1" at 2079.35,2699.99 h60
  text "4" at -769.91,2579.99 h60
  text "Bottom Layer" at -360,2579.99 h60
  text "Copper" at 569.74,2579.99 h60
  text "1.40mil" at 1429.51,2579.99 h60
  text "Bottom Solder" at -360,2459.99 h60
  text "Solder Resist" at 569.74,2459.99 h60
  text "0.40mil" at 1429.51,2459.99 h60
  text "3.5" at 2079.35,2459.99 h60
  text "Bottom Overlay" at -360,2339.99 h60
  text "Symbol" at -755.88,2145 h72
  text "Count" at -250,2145 h72
  text "Hole Size" at 329.85,2145 h72
  text "Plated" at 1429.53,2145 h72
  text "Hole Type" at 1935.4,2145 h72
  text "Drill Layer Pair" at 2669.21,2145 h72
  text "Via/Pad" at 4168.76,2145 h72
  text "Pad Shape" at 4758.6,2145 h72
  text "2" at -250,1995 h60
  text "98.43mil (2.500mm)" at 329.85,1995 h60
  text "PTH" at 1429.53,1995 h60
  text "Round" at 1935.4,1995 h60
  text "Top Layer - Bottom Layer" at 2669.21,1995 h60
  text "Pad" at 4168.76,1995 h60
  text "Rounded" at 4758.6,1995 h60
  text "5" at -250,1845 h60
  text "17.72mil (0.450mm)" at 329.85,1845 h60
  text "PTH" at 1429.53,1845 h60
  text "Round" at 1935.4,1845 h60
  text "Top Layer - Bottom Layer" at 2669.21,1845 h60
  text "Pad" at 4168.76,1845 h60
  text "(Mixed)" at 4758.6,1845 h60
  text "15" at -250,1695 h60
  text "51.18mil (1.300mm)" at 329.85,1695 h60
  text "PTH" at 1429.53,1695 h60
  text "Round" at 1935.4,1695 h60
  text "Top Layer - Bottom Layer" at 2669.21,1695 h60
  text "Pad" at 4168.76,1695 h60
  text "(Mixed)" at 4758.6,1695 h60
  text "A" at -784.97,1685.01 h66.67
  text "94" at -250,1545 h60
  text "7.87mil (0.200mm)" at 329.85,1545 h60
  text "PTH" at 1429.53,1545 h60
  text "Round" at 1935.4,1545 h60
  text "Top Layer - Bottom Layer" at 2669.21,1545 h60
  text "Via" at 4168.76,1545 h60
  text "Rounded" at 4758.6,1545 h60
  text "116 Total" at -250,1395 h60
  text "层叠顺序TOP-LAYER1-LAYER2-BOTTOM" at -880,1090 h200
Top Component Outline:
  circle w0.5: c807.08,0.01 r41.34
  circle w0.5: c-807.09,0.01 r41.34